# Altium PCB Keypad.PcbDoc
Units mm, origin at the board's own origin, x right, y up, seen from the top; angles counter-clockwise.
Board outline 60 x 108 mm, 2 copper layers (Top Layer, Bottom Layer), stack 0.871 mm thick; 31 components, 14 nets, 154 pads, 268 vias.
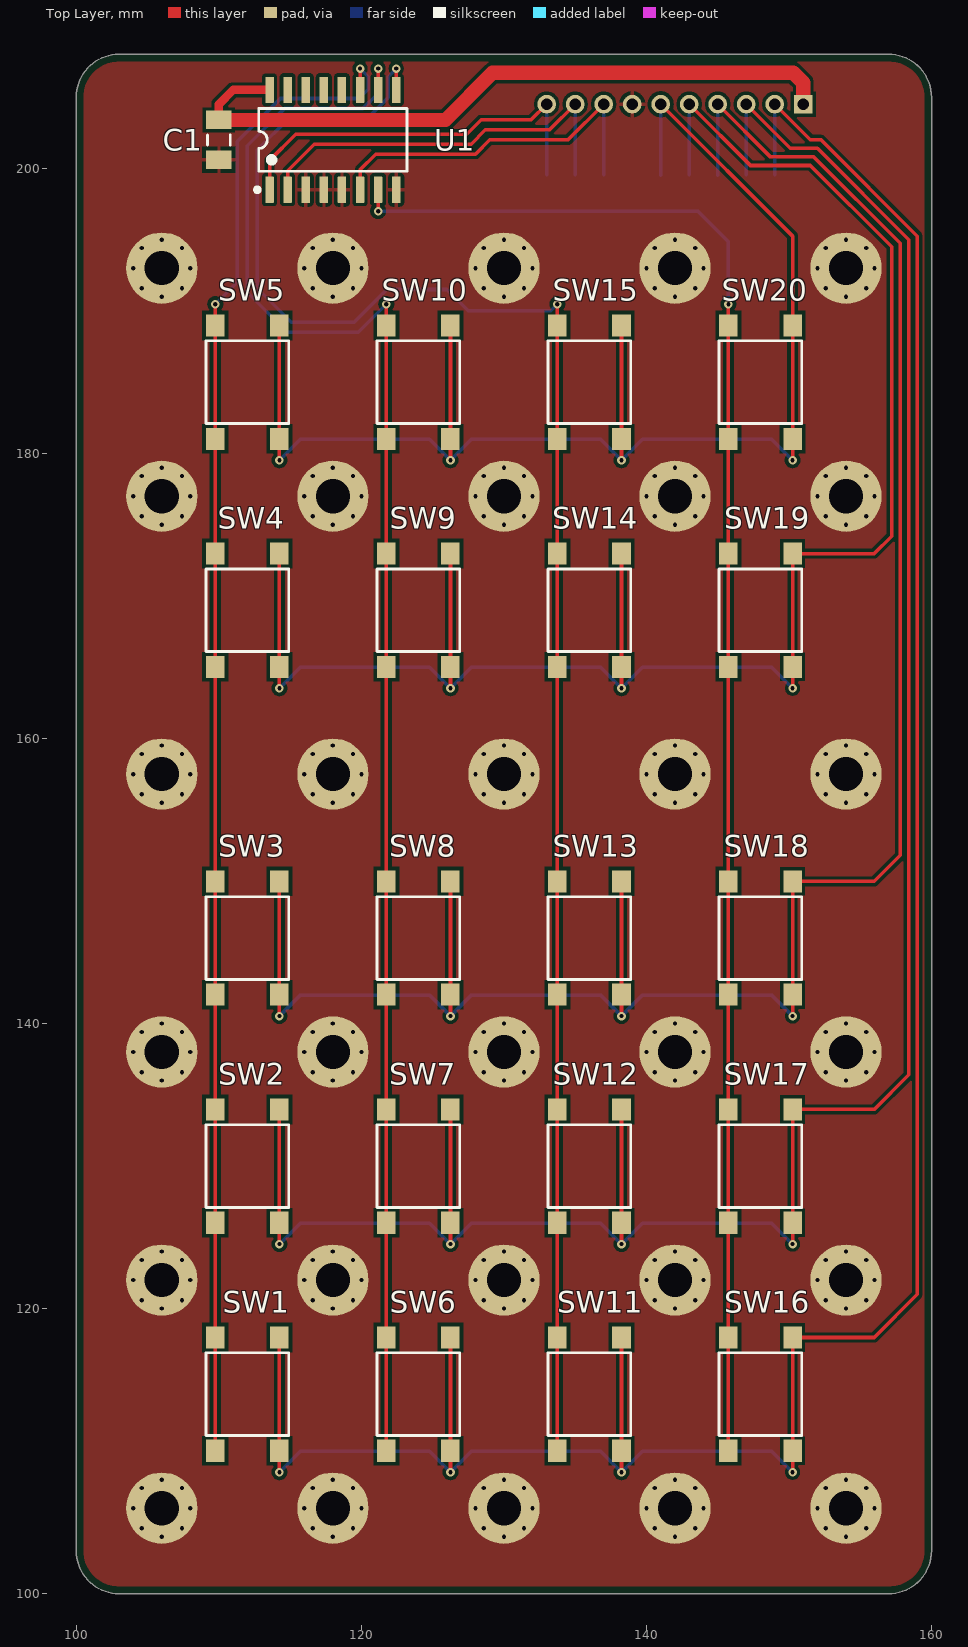
[diagram p0: Top Layer view]
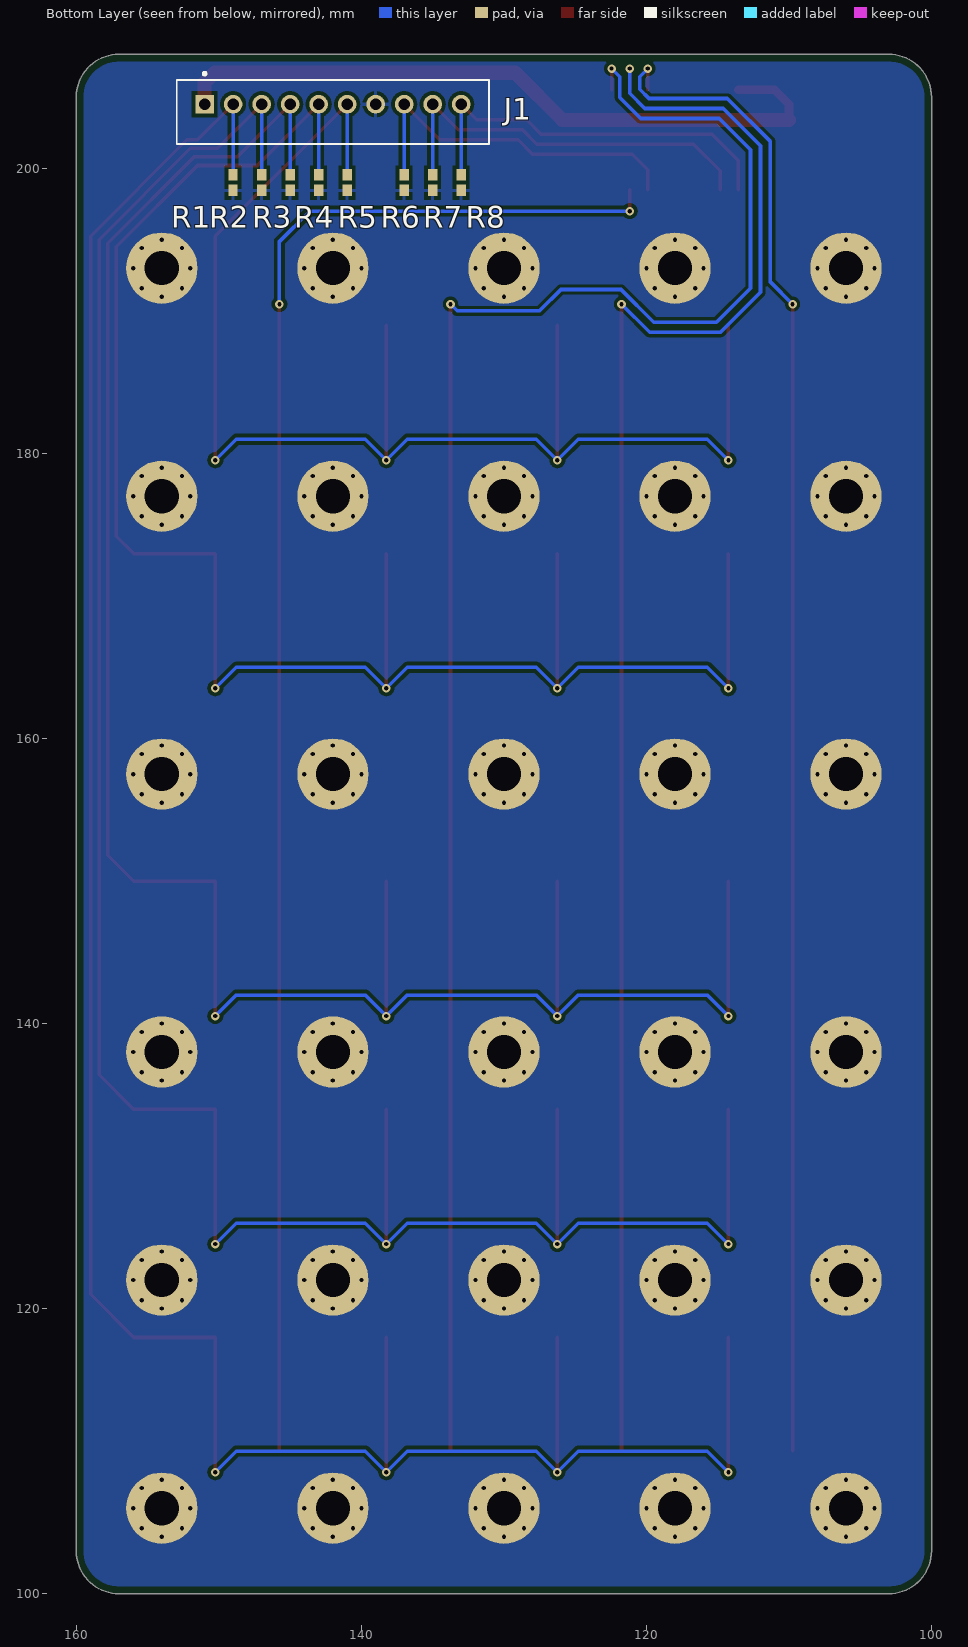
[diagram p1: Bottom Layer view, seen from below]
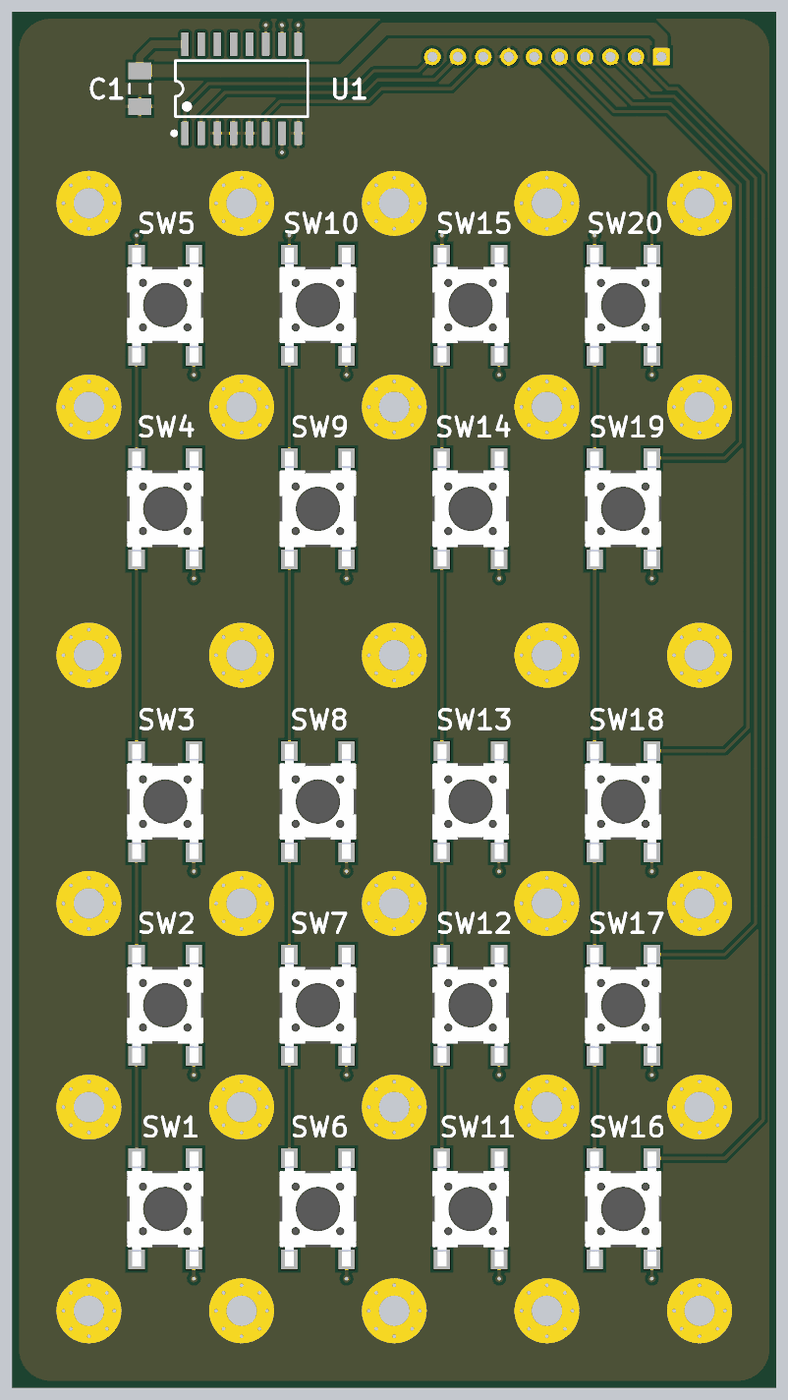
[diagram p2: 3D render of the assembled board from above, using the file's embedded part models]

## Layer stack, top to bottom
Top Solder: solder mask 0.0102, Solder Resist, Dk 3.5
Top Layer: signal copper 0.0356
Dielectric 1: dielectric 0.8, FR-4, Dk 4.8
Bottom Layer: signal copper 0.0356
Bottom Solder: solder mask 0.0102, Solder Resist, Dk 3.5

## Board outline
100,103 100,205 cw(c103,205) 103,208 157,208 cw(c157,205) 160,205 160,103 cw(c157,103) 157,100 103,100 cw(c103,103)

## Design rules (kind name [scope] priority, off if disabled: settings)
BoardOutlineClearance [All] p1: gap=0.5 ignorepadtopadclearanceinfootprint=FALSE except(0: Arc-SplitContinuation Track-SplitContinuation SMDPad-SplitContinuation THPad-SplitContinuation Via-SplitContinuation Fill-SplitContinuation Poly-SplitContinuation Region-SplitContinuation Text-SplitContinuation)
Clearance [All] p1: gap=0.25 ignorepadtopadclearanceinfootprint=FALSE
MinimumSolderMaskSliver [All] p1: minsoldermaskwidth=0.1
PolygonConnect PolygonConnect_MH [( IsPad And ( AsMM(HoleSize) = 2.4 ) ) Or IsVia] p1: connectstyle=Direct reliefconductorwidth=0.254 reliefentries=4 polygonreliefangle="90 Angle" airgapwidth=0.254 // Captures all mounting holes and vias
PolygonConnect [All] p2: connectstyle=Relief reliefconductorwidth=0.254 reliefentries=4 polygonreliefangle="90 Angle" airgapwidth=0.254
RoutingVias [All] p1: holewidth=0.711 width=1.27 viastyle="Through Hole" minholewidth=0.711 minwidth=1.27 maxholewidth=0.711 maxwidth=1.27
SilkToSolderMaskClearance [IsPad] p1: minsilkscreentomaskgap=0.15 clearancetoexposedcopper=TRUE
SolderMaskExpansion SolderMaskExpansion_Via [IsVia] p1: expansion=0.051 istentingtop=TRUE
SolderMaskExpansion [All] p2: expansion=0.051 istentingtop=FALSE
Width [All] p1: maxlimit=2 minlimit=0.15 preferedwidth=0.254 minimp=50.000000 maximp=50.000000 favimp=50.000000
28 further rules are at their usual default settings.

## Components (designator, comment, footprint, x,y, rotation, side; value= is the part's Value field where it differs from the comment)
C1 "10u,20%,50V,X5R,1206" CAPC3216X16N 110,202 r90 top value=10u
J1 "B10B-PH-K-S" JST_B10B-PH-K-S 142,204.5 r0 bottom
R1 "10k,5%,0.063W,0402" RESC1005X04N 149,199 r90 bottom value=10k
R2 "10k,5%,0.063W,0402" RESC1005X04N 147,199 r90 bottom value=10k
R3 "10k,5%,0.063W,0402" RESC1005X04N 145,199 r90 bottom value=10k
R4 "10k,5%,0.063W,0402" RESC1005X04N 143,199 r90 bottom value=10k
R5 "10k,5%,0.063W,0402" RESC1005X04N 141,199 r90 bottom value=10k
R6 "10k,5%,0.063W,0402" RESC1005X04N 137,199 r90 bottom value=10k
R7 "10k,5%,0.063W,0402" RESC1005X04N 135,199 r90 bottom value=10k
R8 "10k,5%,0.063W,0402" RESC1005X04N 133,199 r90 bottom value=10k
SW1 "PTS645SK43SMTR92 LFS" "C&K_PTS645SK43SMTR92 LFS" 112,114 r90 top
SW2 "PTS645SK43SMTR92 LFS" "C&K_PTS645SK43SMTR92 LFS" 112,130 r90 top
SW3 "PTS645SK43SMTR92 LFS" "C&K_PTS645SK43SMTR92 LFS" 112,146 r90 top
SW4 "PTS645SK43SMTR92 LFS" "C&K_PTS645SK43SMTR92 LFS" 112,169 r90 top
SW5 "PTS645SK43SMTR92 LFS" "C&K_PTS645SK43SMTR92 LFS" 112,185 r90 top
SW6 "PTS645SK43SMTR92 LFS" "C&K_PTS645SK43SMTR92 LFS" 124,114 r90 top
SW7 "PTS645SK43SMTR92 LFS" "C&K_PTS645SK43SMTR92 LFS" 124,130 r90 top
SW8 "PTS645SK43SMTR92 LFS" "C&K_PTS645SK43SMTR92 LFS" 124,146 r90 top
SW9 "PTS645SK43SMTR92 LFS" "C&K_PTS645SK43SMTR92 LFS" 124,169 r90 top
SW10 "PTS645SK43SMTR92 LFS" "C&K_PTS645SK43SMTR92 LFS" 124,185 r90 top
SW11 "PTS645SK43SMTR92 LFS" "C&K_PTS645SK43SMTR92 LFS" 136,114 r90 top
SW12 "PTS645SK43SMTR92 LFS" "C&K_PTS645SK43SMTR92 LFS" 136,130 r90 top
SW13 "PTS645SK43SMTR92 LFS" "C&K_PTS645SK43SMTR92 LFS" 136,146 r90 top
SW14 "PTS645SK43SMTR92 LFS" "C&K_PTS645SK43SMTR92 LFS" 136,169 r90 top
SW15 "PTS645SK43SMTR92 LFS" "C&K_PTS645SK43SMTR92 LFS" 136,185 r90 top
SW16 "PTS645SK43SMTR92 LFS" "C&K_PTS645SK43SMTR92 LFS" 148,114 r90 top
SW17 "PTS645SK43SMTR92 LFS" "C&K_PTS645SK43SMTR92 LFS" 148,130 r90 top
SW18 "PTS645SK43SMTR92 LFS" "C&K_PTS645SK43SMTR92 LFS" 148,146 r90 top
SW19 "PTS645SK43SMTR92 LFS" "C&K_PTS645SK43SMTR92 LFS" 148,169 r90 top
SW20 "PTS645SK43SMTR92 LFS" "C&K_PTS645SK43SMTR92 LFS" 148,185 r90 top
U1 "CD74HC238M96" TEXASINSTRUMENTS_PKG_NS0016A 118,202 r90 top

## Footprints (in the part's own frame and the unit in brackets; to place one, negate y for a bottom-side part, rotate by r counter-clockwise, add the part's x,y. Pads: shape width x height; smd on the part's side, far side on the other; paste and mask are expansions set on the pad)
"C&K_PTS645SK43SMTR92 LFS" [mm] "C&K_PTS645SK43SMTR92 LFS"
  rect 1.55x1.3 smd mask+0.05: 1(-3.975,2.25) 2(3.975,2.25) 3(-3.975,-2.25) 4(3.975,-2.25)
  silkscreen extent -2.9,-2.9 2.9,2.9, body extent -4.5,-3 4.5,3, height 4.3
CAPC3216X16N [mm] "Chip Capacitor, 2-Leads, Body 3.20x1.60mm, IPC Medium Density"
  rect 1.3x1.8 smd: 1(-1.4,0) 2(1.4,0)
  silkscreen extent -0.35,-0.8 0.35,0.8, body extent -1.75,-0.95 1.75,0.95, height 1.6
JST_B10B-PH-K-S [mm]
  rect 1.308x1.308 hole 0.8: 1(9,0)
  round 1.308 hole 0.8: 2(7,0) 3(5,0) 4(3,0) 5(1,0) 6(-1,0) 7(-3,0) 8(-5,0) 9(-7,0) 10(-9,0)
  silkscreen extent -10.95,-2.25 10.95,2.8, body extent -10.95,-1.7 10.95,2.8, height 6
RESC1005X04N [mm] "Chip Resistor, 2-Leads, Body 1.0x0.5mm, IPC Medium Density"
  rect 0.8x0.65 smd: 1(-0.55,0) 2(0.55,0)
  body extent -0.52,-0.27 0.53,0.28, height 0.4
TEXASINSTRUMENTS_PKG_NS0016A [mm]
  rrect16% 1.85x0.6 smd: 1(-3.5,4.445) 2(-3.5,3.175) 3(-3.5,1.905) 4(-3.5,0.635) 5(-3.5,-0.635) 6(-3.5,-1.905) 7(-3.5,-3.175) 8(-3.5,-4.445) 9(3.5,-4.445) 10(3.5,-3.175) 11(3.5,-1.905) 12(3.5,-0.635) 13(3.5,0.635) 14(3.5,1.905) 15(3.5,3.175) 16(3.5,4.445)
  silkscreen extent -3.65,-5.2 2.2,5.45

## Part data
C1: library part CAP,Cer,10uF,50VDC,X5R,1206, "10ï¿½F ï¿½20% 50V Ceramic Capacitor X5R 1206 (3216 Metric)", Manufacturer 1="Samsung Electro-Mechanics", Manufacturer 1 Part Number=CL31A106MBHNNNE, Vendor 1 Part Number=1276-6736-1-ND, CreatedBy="Judd Foster", HelpURL=https://www.samsungsem.com/resources/file/global/support/product_catalog/MLCC.pdf, Part Name=CAP,Cer,10uF,50VDC,X5R,1206, Vendor 1=Digikey
J1: library part "CONN,JST,10 Pin,2mm,Vert,Thru", "Connector Header Through Hole 10 position 0.079\" (2.00mm)", Manufacturer 1="JST Sales America Inc.", Vendor 1 Part Number=455-1712-ND, CreatedBy="Judd Foster", HelpURL=https://www.jst-mfg.com/product/pdf/eng/ePH.pdf, Manufacturer 1 Part Number=B10B-PH-K-S, Part Name="CONN,JST,10 Pin,2mm,Vert,Thru", Vendor 1=DigiKey
R1 R2 R3 R4 R5 R6 R7 R8: library part RES,10k,5%,0.063W,0402, "10 kOhms ï¿½5% 0.063W, 1/16W Chip Resistor 0402 (1005 Metric) Automotive AEC-Q200 Thick Film", Manufacturer 1="Stackpole Electronics Inc", Manufacturer 1 Part Number=RMCF0402JT10K0, Vendor 1 Part Number=RMCF0402JT10K0CT-ND, CreatedBy="Judd Foster", HelpURL=https://www.seielect.com/catalog/sei-rmcf_rmcp.pdf, Part Name=RES,10k,5%,0.063W,0402, Vendor 1=DIgikey
SW1 SW2 SW3 SW4 SW5 SW6 SW7 SW8 SW9 SW10 SW11 SW12 SW13 SW14 SW15 SW16 SW17 SW18 SW19 SW20: library part Switch,Tactile,SPST-NO,SMD,H4.3, "Tactile Switch SPST-NO Top Actuated Surface Mount", Manufacturer 1=C&K, Vendor 1 Part Number=CKN9084CT-ND, CreatedBy="Judd Foster", HelpURL=https://www.ckswitches.com/media/1471/pts645.pdf, Manufacturer 1 Part Number="PTS645SK43SMTR92 LFS", Part Name=Switch,Tactile,SPST-NO,SMD,H4.3, Vendor 1=Digikey
U1: "Decoder/Demultiplexer 1 x 3:8 16-SOIC", Manufacturer 1="Texas Instruments", Vendor 1 Part Number=296-24353-1-ND, CreatedBy="Judd Foster", HelpURL=https://www.ti.com/lit/ds/symlink/cd74hc138.pdf?HQS=dis-dk-null-digikeymode-dsf-pf-null-wwe&ts=1751370584044&ref_url=https%253A%252F%252Fwww.ti.com%252Fgeneral%252Fdocs%252Fsuppproductinfo.tsp%253FdistId%253D10%2526gotoUrl%253Dhttps%253A%252F%252Fwww.ti.c, Manufacturer 1 Part Number=CD74HC238M96, Part Name=CD74HC238M96, Vendor 1=DigiKey

## Free pads (board coordinates)
  round 5 hole 2.4: ""(106,106) ""(106,122) ""(106,138) ""(106,157.5) ""(106,177) ""(106,193) ""(118,106) ""(118,122) ""(118,138) ""(118,157.5) ""(118,177) ""(118,193) ""(130,106) ""(130,122) ""(130,138) ""(130,157.5) ""(130,177) ""(130,193) ""(142,106) ""(142,122) ""(142,138) ""(142,157.5) ""(142,177) ""(142,193) ""(154,106) ""(154,122) ""(154,138) ""(154,157.5) ""(154,177) ""(154,193)

## Via types
v1: diameter 0.6, hole 0.3, Top Layer to Bottom Layer, tented both sides, 268 vias

## Nets (pads, with @x,y where several pads share a name; then routed paths per layer and width w, separated by ;. In a path a pad name is that pad's centre, name@x,y a point inside that pad or via, vN(x,y) a via of type N, cw(c..) or ccw(c..) an arc to the next point about the centre after c; other vN are vias at no path point)
+5V0: C1.2 J1.1 U1.16 | length 48.7
  Top Layer w0.6: C1.2 110,204.5 111,205.5 U1.16
  Top Layer w1: C1.2 125.9,203.4 129.2,206.7 150.3,206.7 151,206 J1.1@151,205
A0: J1.10 R8.2 U1.1 | length 28.1
  Top Layer w0.25: U1.1 113.555,200.555 115.4,202.4 127.4,202.4 128.4,203.4 131.9,203.4 J1.10
  Bottom Layer w0.25: R8.2 J1.10
A1: J1.9 R7.2 U1.2 | length 28.4
  Top Layer w0.25: U1.2 114.825,199.825 116.7,201.7 127.7,201.7 128.7,202.7 133.2,202.7 J1.9
  Bottom Layer w0.25: R7.2 J1.9
COL1: J1.2 R1.2 SW1.3 SW1.4 SW6.3 SW6.4 SW11.3 SW11.4 SW16.3 SW16.4 | length 180.5
  Top Layer w0.25: v1(114.25,108.525) SW1.3 SW1.4 ; v1(126.25,108.525) SW6.3 SW6.4 ; v1(138.25,108.525) SW11.3 SW11.4 ; J1.2 151.5,202 152.246,202 159,195.246 159,121 155.975,117.975 SW16.4 SW16.3 v1(150.25,108.525)
  Bottom Layer w0.25: v1(114.25,108.525) 115.725,110 124.775,110 v1(126.25,108.525) 127.725,110 136.775,110 v1(138.25,108.525) 139.725,110 148.775,110 v1(150.25,108.525) ; R1.2 J1.2
COL2: J1.3 R2.2 SW2.3 SW2.4 SW7.3 SW7.4 SW12.3 SW12.4 SW17.3 SW17.4 | length 165.5
  Top Layer w0.25: v1(114.25,124.525) SW2.3 SW2.4 ; v1(126.25,124.525) SW7.3 SW7.4 ; v1(138.25,124.525) SW12.3 SW12.4 ; J1.3 150.1,201.4 151.997,201.4 158.4,194.997 158.4,136.4 155.975,133.975 SW17.4 SW17.3 v1(150.25,124.525)
  Bottom Layer w0.25: v1(114.25,124.525) 115.725,126 124.775,126 v1(126.25,124.525) 127.725,126 136.775,126 v1(138.25,124.525) 139.725,126 148.775,126 v1(150.25,124.525) ; R2.2 J1.3
COL3: J1.4 R3.2 SW3.3 SW3.4 SW8.3 SW8.4 SW13.3 SW13.4 SW18.3 SW18.4 | length 150.5
  Top Layer w0.25: v1(114.25,140.525) SW3.3 SW3.4 ; v1(126.25,140.525) SW8.4 ; v1(138.25,140.525) SW13.3 SW13.4 ; J1.4 148.7,200.8 151.749,200.8 157.8,194.749 157.8,151.8 155.975,149.975 SW18.4 SW18.3 v1(150.25,140.525)
  Bottom Layer w0.25: v1(114.25,140.525) 115.725,142 124.775,142 v1(126.25,140.525) 127.725,142 136.775,142 v1(138.25,140.525) 139.725,142 148.775,142 v1(150.25,140.525) ; R3.2@145,199.525 J1.4
COL4: J1.5 R4.2 SW4.3 SW4.4 SW9.3 SW9.4 SW14.3 SW14.4 SW19.3 SW19.4 | length 128.5
  Top Layer w0.25: v1(114.25,163.525) SW4.3 SW4.4 ; v1(126.25,163.525) SW9.4 ; v1(138.25,163.525) SW14.3 SW14.4 ; J1.5 147.3,200.2 151.5,200.2 157.2,194.5 157.2,174.2 155.975,172.975 SW19.4 SW19.3 v1(150.25,163.525)
  Bottom Layer w0.25: v1(114.25,163.525) 115.725,165 124.775,165 v1(126.25,163.525) 127.725,165 136.775,165 v1(138.25,163.525) 139.725,165 148.775,165 v1(150.25,163.525) ; R4.2 J1.5
COL5: J1.6 R5.2 SW5.3 SW5.4 SW10.3 SW10.4 SW15.3 SW15.4 SW20.3 SW20.4 | length 101.8
  Top Layer w0.25: v1(114.25,179.525) SW5.3 SW5.4 ; v1(126.25,179.525) SW10.3 SW10.4 ; v1(138.25,179.525) SW15.3 SW15.4 ; J1.6 150.25,195.25 SW20.4 SW20.3 v1(150.25,179.525)
  Bottom Layer w0.25: v1(114.25,179.525) 115.725,181 124.775,181 v1(126.25,179.525) 127.725,181 136.775,181 v1(138.25,179.525) 139.725,181 148.775,181 v1(150.25,179.525) ; R5.2@141,199.525 J1.6@141,204 ; J1.6 J1.6@141,205
COM: C1.1 J1.7 pad. R1.1 R2.1 R3.1 R4.1 R5.1 R6.1 R7.1 R8.1 U1.3 U1.4 U1.5 U1.8
  other v1: 106,104 118,104 130,104 142,104 154,104 104.586,104.586 107.414,104.586 116.586,104.586 119.414,104.586 128.586,104.586 131.414,104.586 140.586,104.586 143.414,104.586 152.586,104.586 155.414,104.586 104,106 108,106 116,106 120,106 128,106 132,106 140,106 144,106 152,106 156,106 104.586,107.414 107.414,107.414 116.586,107.414 119.414,107.414 128.586,107.414 131.414,107.414 140.586,107.414 143.414,107.414 152.586,107.414 155.414,107.414 106,108 118,108 130,108 142,108 154,108 106,120 118,120 130,120 142,120 154,120 104.586,120.586 107.414,120.586 116.586,120.586 119.414,120.586 128.586,120.586 131.414,120.586 140.586,120.586 143.414,120.586 152.586,120.586 155.414,120.586 104,122 108,122 116,122 120,122 128,122 132,122 140,122 144,122 152,122 156,122 104.586,123.414 107.414,123.414 116.586,123.414 119.414,123.414 128.586,123.414 131.414,123.414 140.586,123.414 143.414,123.414 152.586,123.414 155.414,123.414 106,124 118,124 130,124 142,124 154,124 106,136 118,136 130,136 142,136 154,136 104.586,136.586 107.414,136.586 116.586,136.586 119.414,136.586 128.586,136.586 131.414,136.586 140.586,136.586 143.414,136.586 152.586,136.586 155.414,136.586 104,138 108,138 116,138 120,138 128,138 132,138 140,138 144,138 152,138 156,138 104.586,139.414 107.414,139.414 116.586,139.414 119.414,139.414 128.586,139.414 131.414,139.414 140.586,139.414 143.414,139.414 152.586,139.414 155.414,139.414 106,140 118,140 130,140 142,140 154,140 106,155.5 118,155.5 130,155.5 142,155.5 154,155.5 104.586,156.086 107.414,156.086 116.586,156.086 119.414,156.086 128.586,156.086 131.414,156.086 140.586,156.086 143.414,156.086 152.586,156.086 155.414,156.086 104,157.5 108,157.5 116,157.5 120,157.5 128,157.5 132,157.5 140,157.5 144,157.5 152,157.5 156,157.5 104.586,158.914 107.414,158.914 116.586,158.914 119.414,158.914 128.586,158.914 131.414,158.914 140.586,158.914 143.414,158.914 152.586,158.914 155.414,158.914 106,159.5 118,159.5 130,159.5 142,159.5 154,159.5 106,175 118,175 130,175 142,175 154,175 104.586,175.586 107.414,175.586 116.586,175.586 119.414,175.586 128.586,175.586 131.414,175.586 140.586,175.586 143.414,175.586 152.586,175.586 155.414,175.586 104,177 108,177 116,177 120,177 128,177 132,177 140,177 144,177 152,177 156,177 104.586,178.414 107.414,178.414 116.586,178.414 119.414,178.414 128.586,178.414 131.414,178.414 140.586,178.414 143.414,178.414 152.586,178.414 155.414,178.414 106,179 118,179 130,179 142,179 154,179 106,191 118,191 130,191 142,191 154,191 104.586,191.586 107.414,191.586 116.586,191.586 119.414,191.586 128.586,191.586 131.414,191.586 140.586,191.586 143.414,191.586 152.586,191.586 155.414,191.586 104,193 108,193 116,193 120,193 128,193 132,193 140,193 144,193 152,193 156,193 104.586,194.414 107.414,194.414 116.586,194.414 119.414,194.414 128.586,194.414 131.414,194.414 140.586,194.414 143.414,194.414 152.586,194.414 155.414,194.414 106,195 118,195 130,195 142,195 154,195
G2: J1.8 R6.2 U1.6 | length 25.4
  Top Layer w0.25: U1.6 119.905,199.905 121,201 128,201 129,202 134.5,202 J1.8
  Bottom Layer w0.25: R6.2 J1.8
ROW1: SW1.1 SW1.2 SW2.1 SW2.2 SW3.1 SW3.2 SW4.1 SW4.2 SW5.1 SW5.2 U1.11 | length 106.4
  Top Layer w0.25: SW1.1 SW2.1 SW3.1 SW3.2 SW4.1 SW4.2 SW5.1 SW5.2 v1(109.75,190.475) ; U1.11 v1(119.905,207)
  Bottom Layer w0.25: v1(109.75,190.475) 111.3,192.025 111.3,201.88 114.32,204.9 119.82,204.9 120.475,205.555 120.475,206.43 v1(119.905,207)
ROW2: SW6.1 SW6.2 SW7.1 SW7.2 SW8.1 SW8.2 SW9.1 SW9.2 SW10.1 SW10.2 U1.10 | length 116.4
  Top Layer w0.25: U1.10 v1(121.175,207) ; SW6.1 SW7.1 SW8.1 SW8.2 SW10.1 SW10.2 v1(121.75,190.475)
  Bottom Layer w0.25: v1(121.175,207) 121.175,205.265 120.11,204.2 114.61,204.2 112,201.59 112,191.3 114.8,188.5 119.775,188.5 v1(121.75,190.475)
ROW3: SW11.1 SW11.2 SW12.1 SW12.2 SW13.1 SW13.2 SW14.1 SW14.2 SW15.1 SW15.2 U1.9 | length 128.4
  Top Layer w0.25: U1.9 v1(122.445,207) ; SW11.1 SW12.1 SW13.1 SW13.2 SW14.1 SW14.2 SW15.1 SW15.2 v1(133.75,190.475)
  Bottom Layer w0.25: v1(122.445,207) 121.875,206.43 121.875,204.975 120.4,203.5 114.9,203.5 112.7,201.3 112.7,191.59 115.09,189.2 119.485,189.2 121.785,191.5 126,191.5 127.5,190 133.275,190 v1(133.75,190.475)
ROW4: SW16.1 SW16.2 SW17.1 SW17.2 SW18.1 SW18.2 SW19.1 SW19.2 SW20.1 SW20.2 U1.7 | length 111.8
  Top Layer w0.25: v1(121.175,197) U1.7 ; SW16.1 SW18.1 SW18.2 SW19.1 SW19.2 SW20.1 SW20.2 v1(145.75,190.475)
  Bottom Layer w0.25: v1(121.175,197) 143.619,197 145.75,194.869 v1(145.75,190.475)
pads on no net: U1.12 U1.13 U1.14 U1.15

## Polygon pours and split planes (outlines as drawn)
COM on Bottom Layer "NONET_L-01_P-001" (solid, remove dead copper, pour order 0): 160,100 160,208 100,208 100,100
COM on Top Layer "NONET_L-01_P-001" (solid, remove dead copper, pour order 1): 160,100 160,208 100,208 100,100

## Silkscreen, mask and mechanical layers (free items; w line width, h text height)
Mechanical 1:
  circle w0.1: c154,106 r1.2
  circle w0.1: c142,138 r1.2
  circle w0.1: c142,122 r1.2
  circle w0.1: c142,106 r1.2
  circle w0.1: c154,122 r1.2
  circle w0.1: c154,138 r1.2
  circle w0.1: c106,193 r1.2
  circle w0.1: c106,177 r1.2
  circle w0.1: c106,122 r1.2
  circle w0.1: c106,138 r1.2
  circle w0.1: c118,106 r1.2
  circle w0.1: c118,122 r1.2
  circle w0.1: c130,138 r1.2
  circle w0.1: c130,122 r1.2
  circle w0.1: c130,106 r1.2
  circle w0.1: c118,138 r1.2
  circle w0.1: c118,193 r1.2
  circle w0.1: c118,177 r1.2
  circle w0.1: c130,193 r1.2
  circle w0.1: c130,177 r1.2
  circle w0.1: c142,193 r1.2
  circle w0.1: c142,177 r1.2
  circle w0.1: c154,193 r1.2
  circle w0.1: c154,177 r1.2
  circle w0.1: c106,157.5 r1.2
  circle w0.1: c118,157.5 r1.2
  circle w0.1: c130,157.5 r1.2
  circle w0.1: c142,157.5 r1.2
  circle w0.1: c154,157.5 r1.2
  circle w0.1: c106,106 r1.2
  lines w0.1: 100,103 ccw(c103,103) 103,100 157,100 ccw(c157,103) 160,103 160,205 ccw(c157,205) 157,208 103,208 ccw(c103,205) 100,205 100,103
  lines w0.2: 106,106 118,122 ; 106,154 118,138 ; 106,161 118,177 ; 106,193 118,177 ; 154,106 142,122 ; 154,154 142,138 ; 154,161 142,177 ; 154,193 142,177 ; 118,122 130,138 ; 118,122 106,138 118,154 130,138 ; 118,122 130,106 142,122 ; 118,138 130,154 142,138 ; 118,138 130,122 ; 118,138 106,122 118,106 130,122 ; 118,177 130,161 142,177 ; 118,177 130,193 142,177 ; 130,122 142,138 ; 130,122 142,106 154,122 142,138 ; 130,138 142,154 154,138 142,122 ; 130,138 142,122 ; 130,177 118,161 106,177 118,193 130,177 ; 130,177 142,161 154,177 142,193 130,177